# Altium PCB PCB1.PcbDoc (part 2 of 2)
Units mil, origin at the board's own origin, x right, y up, seen from the top; angles counter-clockwise.
Board outline 3661.42 x 3543.31 mil, 2 copper layers (Top Layer, Bottom Layer); 305 components, 305 nets, 1414 pads, 47 vias.
Unrouted connection lines stored in the file: 699.
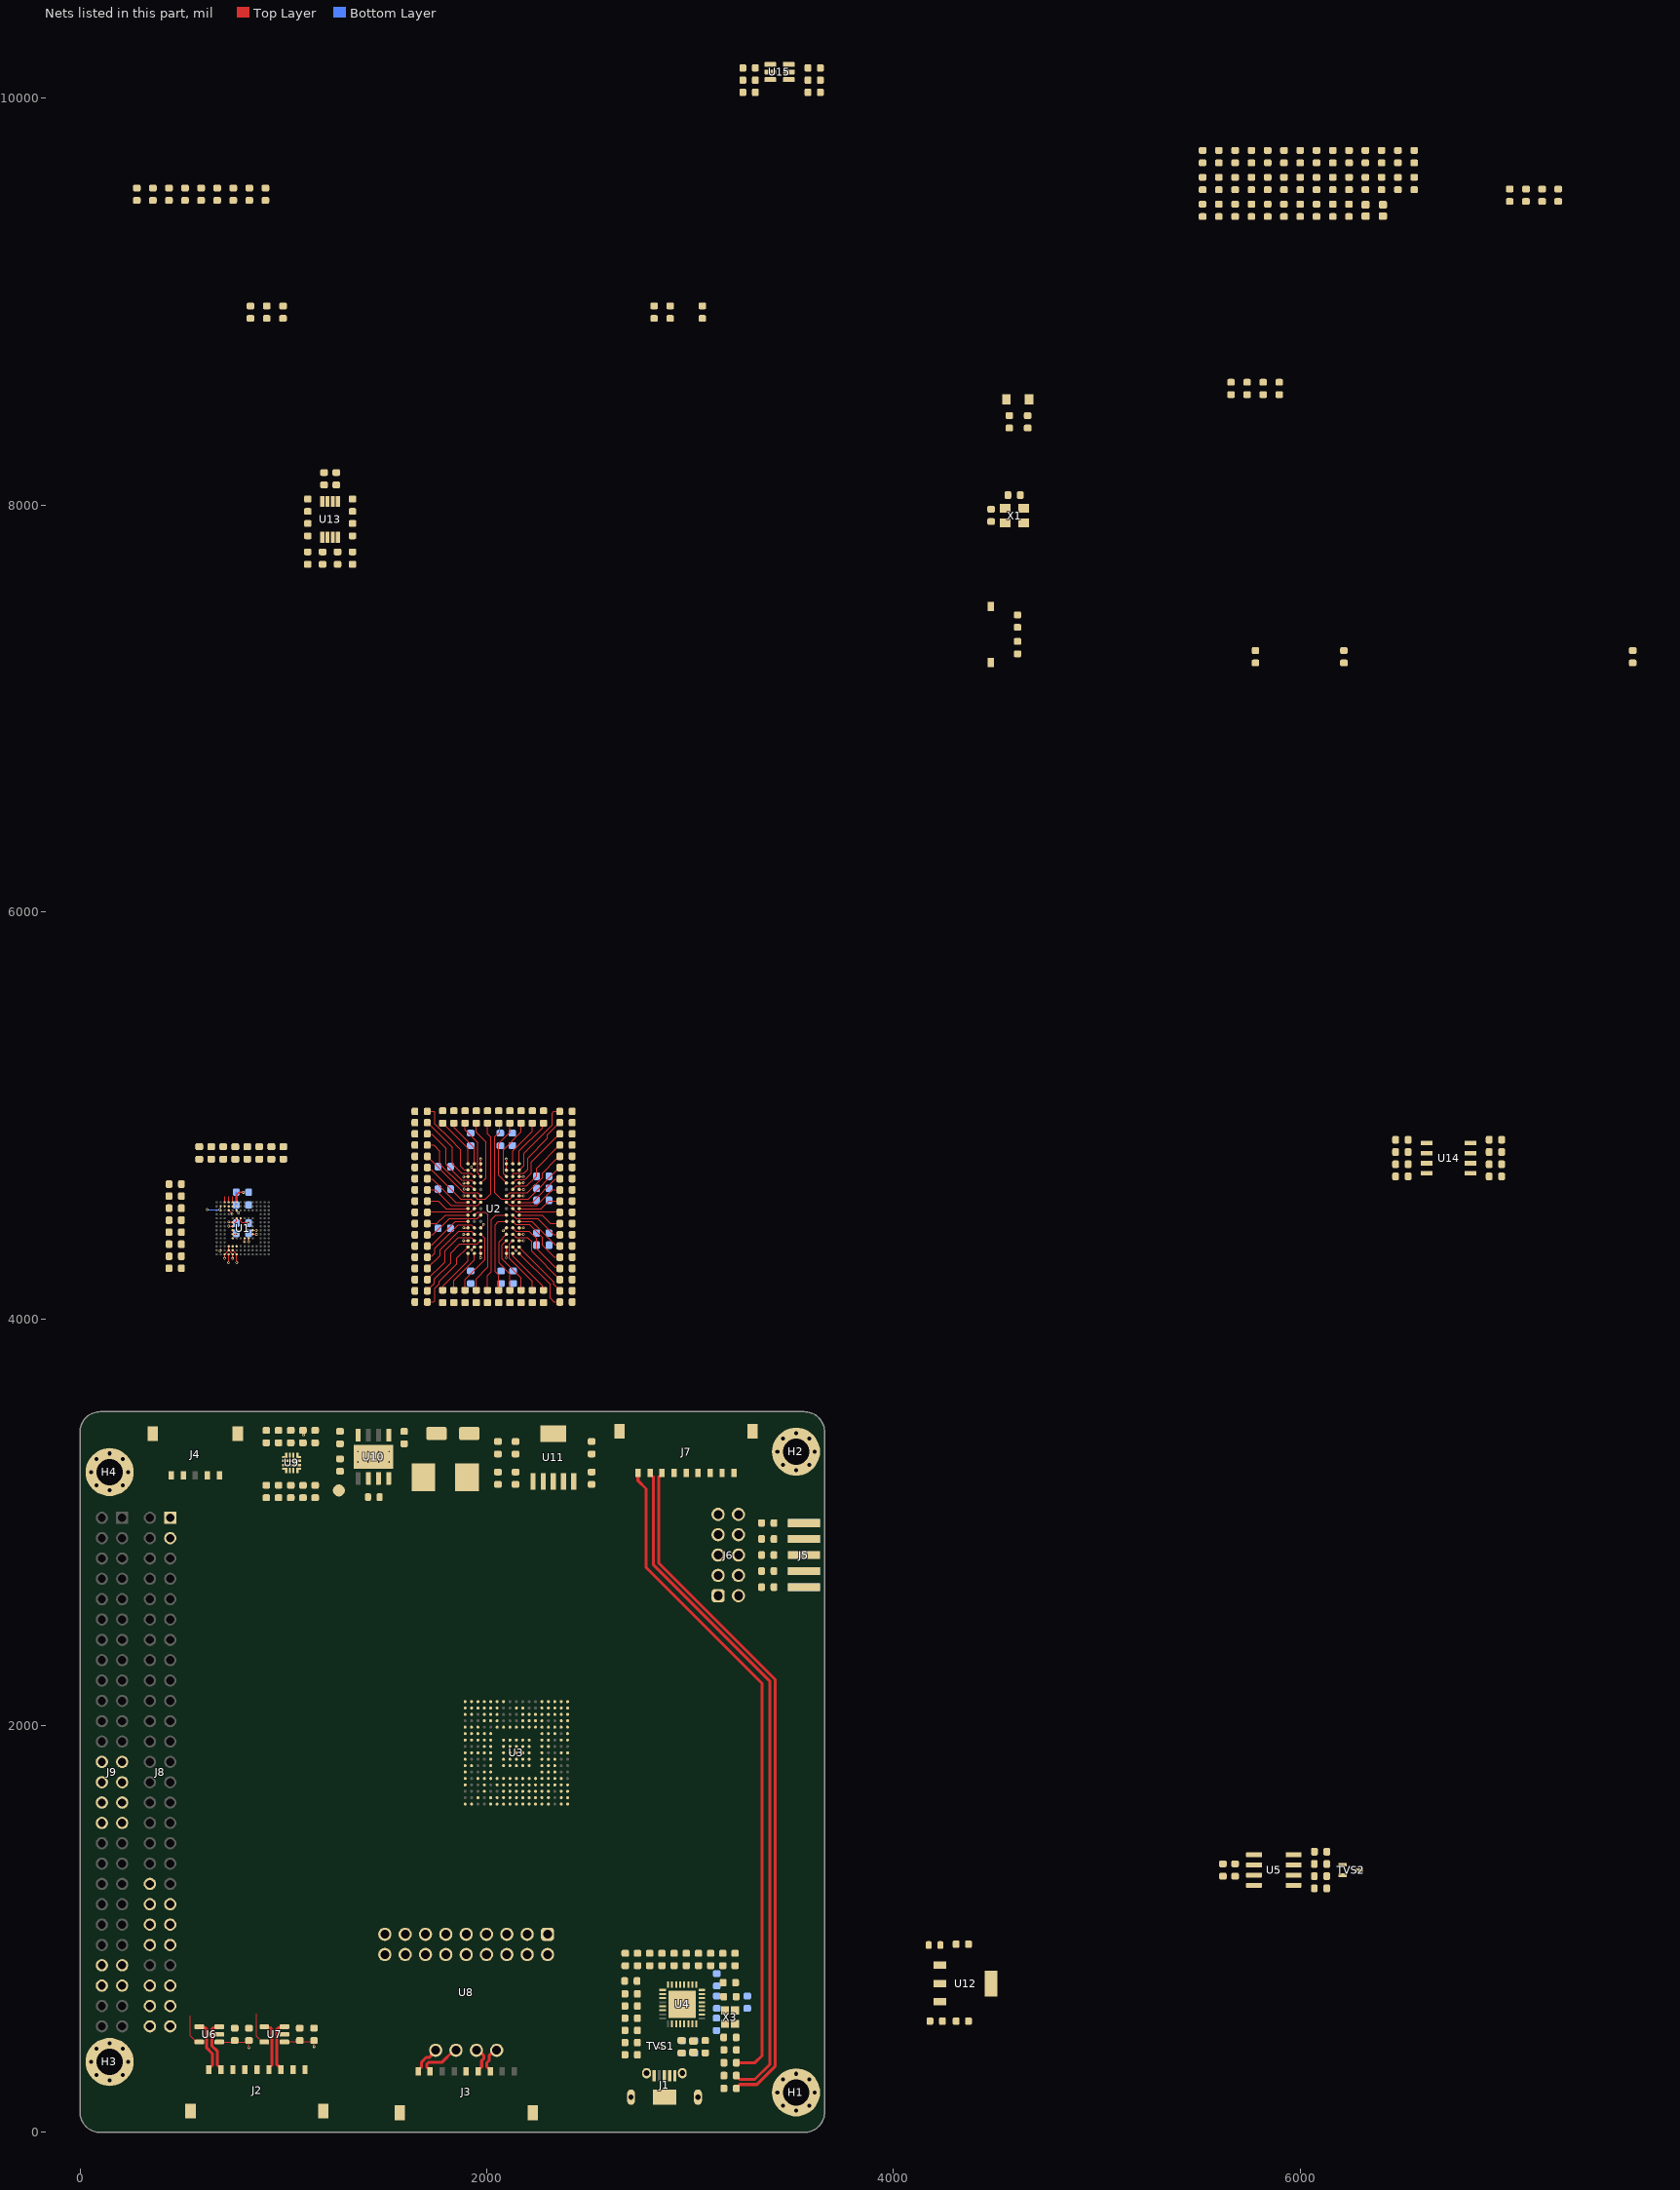
[diagram p2: the nets of this part, all layers, seen from the top]

## Part data
BT1: library part BT2, "Switch button 2 pin"
C1 C2 C3 C4 C5 C6 C7 C8 C9 C10 C11 C12 C13 C14 C15 C16 C17 C18 C19 C20 C21 C22 C23 C24 C25 C26 C27 C28 C29 C30 C31 C32 C33 C34 C35 C36 C37 C38 C39 C40 C41 C44 C45 C46 C47 C48 C49 C50 C51 C52 C53 C54 C55 C56 C57 C58 C59 C60 C61 C62 C63 C64 C65 C66 C67 C68 C69 C70 C71 C72 C73 C74 C75 C76 C77 C78 C79 C80 C81 C82 C83 C84 C85 C86 C87 C88 C89 C90 C91 C92 C93 C94 C95 C96: library part CAP_SMD, "CAP_Chip"
C42 C43: library part _CAP_C_2, "CAP CHIP"
D1: "DIODE SCHOTTKY 40V 5A SMA", MPN=SS34, Solder=SMT
FB1 FB2 FB3: "FERRITE BEAD"
J1: "RightAngle SMT TypeABVersion 2.0 Micro USB Conn Skt,30Vac,1.8A 47650 MICRO-USB", Package=None, Check_prices=https://www.snapeda.com/parts/47590-0001/Molex/view-part/?ref=eda, MF=Molex, MP=47590-0001, SnapEDA_Link=https://www.snapeda.com/parts/47590-0001/Molex/view-part/?ref=snap
J2 J3 J7: "Connector Header Surface Mount, Right Angle 9 position 0.059\" (1.50mm)"
J4: "1.50mm Pitch, Pico-Lock PCB Header, Single Row, Right-Angle, Surface Mount, Gold (Au) Plating, Positive Lock, 5 Circuits, Tape and Reel", Manufacturer_Name="Molex Connector Corporation", Copyright="Copyright (C) 2025 Ultra Librarian. All rights reserved.", Manufacturer_Part_Number=5040500591, RefDes=RefDes, Type=Type
J5: "pads for STLink V3 minie"
J6: "WR-PHD Pin Header, THT, Vertical, pitch 2.54mm, 2 Row, 10P", Contact Resistance=20mOhm, Manufacturer="Wurth Elektronik", Operating Temperature Max=105°C, Operating Temperature Min=-40°C, Rated Current=3A, Withstanding Voltage=500V, Working Voltage=250V, Category="Board-to-Board Connectors", ComponentLink1Description="Website Link", ComponentLink1URL=https://www.we-online.com/redexpert/article/61301021121?ad, ComponentLink2Description="Datasheet Link", ComponentLink2URL=https://www.we-online.com/redexpert/spec/61301021121?ad, Gender="Pin Header", Manufacturer Part Number=61301021121, Match Code=WR-PHD, Mount="Through Hole", Number of Pins=10, Number Of Rows=2, Orientation=Vertical, Packaging=Bag, Pitch=2.54mm
J8 J9: "PC / 104 Connectors Elevated Socket Strip"
L1: library part _IND, "FIXED IND 22UH 2.5A 170 MOHM SMD"
L2: library part IND
LED1 LED2 LED3 LED4 LED5: library part "LED SMD"
R1 R2 R3 R4 R5 R6 R7 R8 R9 R10 R11 R12 R13 R14 R15 R16 R17 R18 R19 R20 R21 R22 R23 R24 R25 R26 R27 R28 R29 R30 R31 R32 R33 R34 R35 R36 R37 R38 R39 R40 R41 R42 R43 R44 R45 R46 R47 R48 R49 R50 R51 R52 R53 R54 R55 R56 R57 R58 R59 R60 R61 R62 R63 R64 R65 R66 R67 R68 R69 R70 R71 R72 R73 R74 R75 R76 R77 R78 R79 R80 R81 R82 R83 R84 R85 R86 R87 R88 R89 R90 R91 R92 R93 R94 R95 R96 R97 R98 R99 R100 R101 R102 R103 R104 R105 R106 R107 R108 R109 R110 R111 R112 R113 R114 R115 R116 R117 R118 R119 R120 R121 R122 R123 R124 R125 R126 R127 R128 R129 R130 R131 R132 R133 R134 R135 R136 R137 R138 R139 R140 R141 R142 R143 R144 R145 R146 R147 R148 R149 R150 R151 R152 R153 R154 R155 R156 R157 R158 R159 R160 R161: library part _RES_B_2, "RES"
TP1: library part MCD-00630, "Test Point 0.3mm", Manufacturer=N/A, Manufacturer_HQ_COO=Unknown, Component_Country_Of_Origin=Unknown, ComponentLink1URL=http://tunmcdsvn.tun.st.com/Component_Documentation_Library/Trunk, ECCN_EU=n/a, ECCN_US=n/a, ID=3115, Initial_Board_Reference=MB1264, Internal_Part_Number=MCD-00630, Manufacturer_Part_Number=N/A, Order_Code_Digikey=N/A, Order_Code_Farnell=N/A, Order_Code_RS=N/A, Part_Preference=Recommended, Part_Type=Misc, Provided_By=n/a, ShowFields=YES, Status=Released
TVS1: "TVS DIODE 3VWM 4FLIPCHIP", Manufacturer_Name=STMicroelectronics, Copyright="Copyright (C) 2025 Ultra Librarian. All rights reserved.", Manufacturer_Part_Number=USBULC6-2F3, RefDes=RefDes, Type=Type
TVS2: "Automotive dual-line TVS in SOT323-3L for CAN bus (12 V system)", Manufacturer_Name=STMicroelectronics, Copyright="Copyright (C) 2025 Ultra Librarian. All rights reserved.", Manufacturer_Part_Number=ESDCAN02-2BWY, RefDes=RefDes, Type=Type
U1: "NAND Flash Serial e-MMC 3.3V 32G-bit 32G/8G/4G x 1/4-bit/8-bit 13.7ns 153-Pin WFBGA", Manufacturer_Name="KIOXIA Corporation", Mouser Part Number=757-THGBMTG5D1LBAIL, Arrow Part Number=THGBMTG5D1LBAIL, Arrow Price/Stock=null?region=nac, Datasheet Link=https://static6.arrow.com/aropdfconversion/5b79d7e5222d5200711a0ed1082b7aa51b6d9eb4/xia_thgbmtg5d1lbail15nm4gbe-mmcver5.0_e_rev.1.0_20211007.pdf, Geometry.Height=0.8mm, Manufacturer_Part_Number=THGBMTG5D1LBAIL, Mouser Price/Stock=https://www.mouser.co.uk/ProductDetail/Kioxia-America/THGBMTG5D1LBAIL?qs=Znm5pLBrcAKPRFVhV%252B0AbQ%3D%3D
U2: "DRAM 128M, 3.3V, SDRAM, 4Mx32, 166Mhz, 90 ball BGA (8mmx13mm) RoHS", Manufacturer_Name="Integrated Silicon Solution Inc.", Arrow Part Number=IS42S32400J-6BL, Arrow Price/Stock=https://www.arrow.com/en/products/is42s32400j-6bl/integrated-silicon-solution-inc?utm_currency=USD&region=nac, Datasheet Link=https://www.issi.com/WW/pdf/42-45S32400J.pdf, Geometry.Height=1.2mm, Manufacturer_Part_Number=IS42S32400J-6BL
U3: "High-performance and DSP with DP-FPU, Arm Cortex-M7 + Cortex-M4 MCU with 2MBytes of Flash memory, 1MB RAM, 480 MHz CPU, Art Accelerator, L1 cache, external memory interface, large set of peripherals, SMPS", Manufacturer_Name=STMicroelectronics, Copyright="Copyright (C) 2025 Ultra Librarian. All rights reserved.", Datasheet=https://www.st.com/resource/en/datasheet/stm32h745zg.pdf, Manufacturer_Part_Number=STM32H745XIH6, RefDes=RefDes, Type=Type
U4: "IC TRANSCEIVER HALF 1/1 32QFN"
U5: "3.3 V CAN Transceiver with Standby Mode", Package="SOIC-8 Texas Instruments", Check_prices=https://www.snapeda.com/parts/SN65HVD230DR/Texas+Instruments/view-part/?ref=eda, MF="Texas Instruments", MP=SN65HVD230DR, SnapEDA_Link=https://www.snapeda.com/parts/SN65HVD230DR/Texas+Instruments/view-part/?ref=snap
U6 U7: "Automotive LVDS Differential Driver"
U10: "5.5V to 36V Input, 3A, 500kHz Step-Down Converter", Package="HSOIC-8 Texas Instruments", Availability="In Stock", Check_prices=https://www.snapeda.com/parts/TPS5430DDAR/Texas+Instruments/view-part/?ref=eda, MF="Texas Instruments", MP=TPS5430DDAR, Price=None, Purchase-URL=https://pricing.snapeda.com/search/part/TPS5430DDAR/?ref=eda, SnapEDA_Link=https://www.snapeda.com/parts/TPS5430DDAR/Texas+Instruments/view-part/?ref=snap
U11: "1.5-A, 20-V, ultra-low-dropout voltage regulator with reverse current protection & enable 6-SOT-223 -40 to 125", Manufacturer_Name="Texas Instruments", Copyright="Copyright (C) 2025 Ultra Librarian. All rights reserved.", Datasheet=https://www.ti.com/lit/gpn/tps7a45, Manufacturer_Part_Number=TPS7A4533DCQR, RefDes=RefDes, Type=TYPE
U12: "Adjustable and fixed low drop positive voltage regulator", Manufacturer_Name=STMicroelectronics, Copyright="Copyright (C) 2025 Ultra Librarian. All rights reserved.", Datasheet=https://www.st.com/resource/en/datasheet/ld1117.pdf, Manufacturer_Part_Number=LD1117S18TR, RefDes=RefDes, Type=Type
U13: "No Description Available", Manufacturer_Name=NXP, Copyright="Copyright (C) 2025 Ultra Librarian. All rights reserved.", Manufacturer_Part_Number=PCA9508DP,118, RefDes=RefDes, Type=Type
U14: "No Description Available", Manufacturer_Name=ISSI, Copyright="Copyright (C) 2025 Ultra Librarian. All rights reserved.", Manufacturer_Part_Number=IS66WVS4M8BLL-104NLI, RefDes=RefDes, Type=Memory
U15: "OSC PROG TIMER TSOT23-6"
X1: "Crystal, 16 MHz, -30 to 85 degC, 3.2 x 2.5 x 0.9 mm SMD"
X2: "32.768 kHz ±20ppm Crystal 12.5pF 70 kOhms 2-SMD, No Lead", Manufacturer_Name=NDK, Copyright="Copyright (C) 2025 Ultra Librarian. All rights reserved.", Manufacturer_Part_Number=MU00525-32.768K, Type=Crystals
X3: library part NSC5004D-25M, "XTAL OSC XO 24.0000MHZ CMOS SMD", Manufacturer_Name=NDK, Manufacturer_Part_Number=NSC5004A-25M, Copyright="Copyright (C) 2025 Ultra Librarian. All rights reserved.", RefDes=RefDes, Type=Oscillators

## Via types
v1: diameter 13.78, hole 7.87, Top Layer to Bottom Layer, 47 vias

## Nets (pads, with @x,y where several pads share a name; then routed paths per layer and width w, separated by ;. In a path a pad name is that pad's centre, name@x,y a point inside that pad or via, vN(x,y) a via of type N, cw(c..) or ccw(c..) an arc to the next point about the centre after c; other vN are vias at no path point)
1V8: C29.2 C50.2 C51.2 U4.28 U4.30 U12.2
3.3V: C33.1 C34.1 U5.3
3V3: C1.2 C2.2 C3.2 C4.2 C7.2 C8.2 C9.2 C10.2 C11.2 C12.2 C13.2 C14.2 C15.2 C16.2 C17.2 C18.2 C19.2 C20.2 C27.2 C28.2 C32.2 C36.2 C37.2 C38.2 C39.2 C48.2 C49.2 C54.2 C55.2 C56.2 C57.2 C58.2 C59.2 C60.2 C61.2 C62.2 C63.2 C64.2 C65.2 C66.2 C67.2 C68.2 C69.2 C70.1 C71.2 C72.2 C73.2 C74.2 C75.2 C76.2 C77.2 C78.2 C79.2 C80.2 C82.1 C84.2 C85.2 C88.1 C89.1 C90.2 C91.2 C92.1 C95.2 C96.2 FB2.1 FB3.1 J5.6 J6.1 L2.1 R1.2 R2.2 R3.2 R4.2 R5.2 R6.2 R7.2 R8.2 R17.2 R18.2 R79.1 R81.1 R82.1 R84.1 R87.1 R106.2 R107.1 R108.1 R109.1 R110.1 R117.2 R118.2 R126.2 R133.1 R134.1 R135.1 R136.1 R150.2 R151.2 R152.2 U1.C6 U1.E6 U1.F5 U1.J10 U1.K9 U1.M4 U1.N4 U1.P3 U1.P5 U2.A7 U2.B2 U2.B7 U2.C9 U2.D9 U2.E1 U2.F9 U2.L1 U2.L7 U2.M9 U2.N9 U2.P2 U2.P7 U2.R7 U3.A6 U3.B1 U3.C17 U3.E6 U3.E9 U3.E11 U3.F5 U3.F17 U3.G2 U3.G5 U3.G13 U3.G17 U3.H5 U3.H13 U3.J13 U3.K5 U3.K13 U3.L5 U3.L13 U3.M5 U3.M13 U3.N7 U3.N8 U3.N10 U3.N11 U3.N12 U3.P17 U3.U12 U4.21 U4.32 U6.1 U7.1 U11.4 U11.5 U12.3 U13.1 U13.8 U14.8 U15.1 X3.4 | length 1012.6
  Top Layer w5.91: U6.1@685.24,444.72 753.94,444.72 C39.2@760.83,451.61 768.1,444.34 823.55,444.34 C38.2@830.83,451.61 v1(830.83,417.13) ; v1(711.31,4297) 711.37,4297.06 711.37,4317.13 U1.P3@711.42,4317.19 U1.N4@731.11,4336.87 ; U1.M4@731.11,4356.56 U1.N4@731.11,4336.87 ; v1(731.47,4476.12) 732.2,4475.39 750.07,4475.39 U1.F5@750.79,4474.67 763.39,4474.67 770.48,4481.76 U1.E6@770.48,4494.35 ; v1@750.79,4297.11 U1.P5@750.79,4317.19 U1.N4@731.11,4336.87 ; U1.C6@770.48,4533.72 770.48,4531.99 779.65,4522.81 v1(779.65,4520.88) ; U1.K9@829.53,4395.93 829.72,4395.74 829.72,4379.23 v1(829.91,4379.04) ; U1.J10@848.82,4415.22 U1.J10@849.22,4415.61 849.53,4415.3 867.64,4415.3 v1(867.96,4414.98) ; U7.1@1005.24,444.72 1006.18,445.67 1149.88,445.67 C36.2@1150.83,446.61 ; v1(1150.83,422.13) C36.2@1150.83,446.61 ; C36.2@1150.83,451.61 C36.2@1150.83,446.61 ; v1(1886.95,4447.58) 1887.36,4447.17 U2.L1@1907.72,4447.17 U2.L1@1908.14,4446.75 ; v1(1888.48,4637.99) 1889.4,4637.06 1906.8,4637.06 U2.E1@1907.72,4636.14 ; v1(1924.47,4745.48) 1924.47,4745.43 1939.18,4730.72 U2.B2@1939.23,4730.72 ; v1(1925.08,4338.07) 1925.08,4338.3 1939.22,4352.44 U2.P2@1939.22,4352.68 ; v1(2081.1,4433.25) 2081.94,4433.25 2095.85,4447.17 U2.L7@2096.7,4447.17 ; U2.B7@2096.7,4730.63 v1(2096.7,4785.9) ; U2.N9@2159.27,4384.59 U2.N9@2159.69,4384.17 2180.05,4384.17 v1(2180.47,4383.76) ; U2.M9@2159.27,4416.09 U2.M9@2159.69,4415.67 2180.05,4415.67 v1(2180.47,4415.25) ; U2.F9@2159.27,4605.06 U2.F9@2159.69,4604.65 2180.05,4604.65 v1(2180.47,4604.23) ; U2.D9@2159.69,4667.64 2160.19,4668.14 2179.79,4668.14 v1(2180.3,4668.64) ; U2.C9@2159.72,4699.16 v1(2179.8,4699.19)
  Top Layer w8: v1(2096.28,4300.4) 2096.49,4300.61 2096.49,4352.47 U2.P7@2096.7,4352.68
  Bottom Layer w8: C4.2@768.43,4559.75 C3.2@768.43,4622.74 ; C4.2@768.78,4559.4 768.78,4531.65 v1@779.56,4520.88
  other v1: 750.74,4297.06
3V3_BUS: J9.27 J9.28
3V3_SW1: J8.48
3V3_SW2: J8.50
3V3_SW3: J8.52
5V: C46.2 C47.2 C52.2 C53.2 L1.2 R123.1 R125.2 U11.1 U11.2
5V_BUS: J9.25 J9.26
5V_SW1: J8.47
5V_SW2: J8.49
5V_SW3: J8.51
12V: C40.2 C45.2 R124.2 SB1.2 TP1.1 U9.6 U10.7
12V_CONN: C41.2 J4.1 J4.2 J7.1 R119.1 SB1.1 U9.5
ADC_ILM: C21.2 R85.2
AUXOFF: R117.1 U9.3
BOOT0: R81.2 R83.1 U3.E8
CAN0_H: J8.03 R142.2
CAN0_L: J8.01 R141.2
CAN_RX: U3.E16 U5.4
CAN_TX: U3.E17 U5.1
COMM_I2C4_EN: R139.2
COMM_I2C4_SCL: R137.2 U3.B5 U3.R16
COMM_I2C4_SDA: R138.2 U3.C5 U3.R17
DEBUG_UART_RX: J5.10 R132.1 U3.N4
DEBUG_UART_TX: J5.9 R131.1 U3.N5
eMMC_RSTn: R17.1 R19.1 U1.K5
FLT#: R118.1 U9.4
FPGA_D0: U3.N6 U8.1
FPGA_D1: U3.P6 U8.2
FPGA_D2: U3.T6 U8.3
FPGA_D3: U3.U6 U8.4
FPGA_D4: U3.U7 U8.5
FPGA_D5: U3.R12 U8.6
FPGA_D6: U3.N15 U8.7
FPGA_D7: U3.N14 U8.8
FPGA_D8: U3.N13 U8.9
FPGA_D9: U3.M14 U8.10
FPGA_RefC: U3.E15 U8.18
FPGA_STATUS0: U3.L14 U8.11
FPGA_STATUS1: U3.K14 U8.12
FPGA_STATUS2: U3.D11 U8.13
FPGA_STATUS3: U3.E10 U8.14
FPGA_STATUS4: U3.D10 U8.15
FPGA_TxC: U3.N3 U8.17
FPGA_TxC_N: J3.7 U8.19 | length 138
  Top Layer w15: J3.7@2017.09,300.87 2017.09,308.37 2011.59,313.87 2008.85,313.87 2000.06,322.65 2000.06,342.23 2011.48,353.64 2011.48,376.42 2039.3,404.25 U8.19@2048.98,404.25
FPGA_TxC_P: J3.6 U8.20 | length 138
  Top Layer w15: U8.20@1948.98,404.25 1958.65,404.25 1986.48,376.42 1986.48,364 1975.06,352.58 1975.06,322.65 1966.27,313.87 1963.53,313.87 1958.03,308.37 J3.6@1958.03,300.87
FPGA_TxD_N: J3.2 U8.21 | length 215.7
  Top Layer w15: J3.2@1721.81,300.87 1721.81,308.37 1716.31,313.87 1713.57,313.87 1704.78,322.65 1704.78,335.08 1713.57,343.87 1778.92,343.87 1839.3,404.25 U8.21@1848.98,404.25
FPGA_TxD_P: J3.1 U8.22 | length 150
  Top Layer w15: J3.1@1662.76,300.87 1662.76,308.37 1668.26,313.87 1671,313.87 1679.78,322.65 1679.78,345.43 1703.21,368.87 1719.03,368.87 1748.98,398.81 U8.22@1748.98,404.25
FRAM_CS: R153.1
FRAM_SPI6_MISO: R156.1
FRAM_SPI6_MOSI: R155.1
FRAM_SPI6_SCK: R154.1
GND: BT1.1 C1.1 C2.1 C3.1 C4.1 C5.1 C6.1 C7.1 C8.1 C9.1 C10.1 C11.1 C12.1 C13.1 C14.1 C15.1 C16.1 C17.1 C18.1 C19.1 C20.1 C21.1 C22.1 C23.1 C24.1 C25.1 C26.1 C27.1 C28.1 C29.1 C30.1 C31.1 C32.1 C33.2 C34.2 C35.2 C36.1 C37.1 C38.1 C39.1 C40.1 C41.1 C42.1 C43.1 C45.1 C46.1 C47.1 C48.1 C49.1 C50.1 C51.1 C52.1 C53.1 C54.1 C55.1 C56.1 C57.1 C58.1 C59.1 C60.1 C61.1 C62.1 C63.1 C64.1 C65.1 C66.1 C67.1 C68.1 C69.1 C70.2 C71.1 C72.1 C73.1 C74.1 C75.1 C76.1 C77.1 C78.1 C79.1 C80.1 C81.1 C82.2 C83.2 C84.1 C85.1 C86.1 C87.1 C88.2 C89.2 C90.1 C91.1 C92.2 C93.1 C94.1 C95.1 C96.1 D1.1 H1.1 H2.1 H3.1 H4.1 J1.5 J1.SH1 J1.SH2 J1.SH3 J1.SH4 J1.SH5 J2.5 J2.10 J3.5 J3.10 J4.4 J4.5 J4.6 J5.7 J6.3 J6.10 J7.2 J7.10 J9.29 J9.30 J9.31 J9.32 J9.47 J9.48 LED3.2 LED4.2 LED5.2 R22.1 R83.2 R86.2 R95.2 R111.2 R112.2 R113.2 R116.1 R121.2 R122.2 R127.2 R140.2 R160.1 R161.1 TVS1.B1 TVS1.B2 TVS2.3 U1.A6 U1.C4 U1.E7 U1.G5 U1.H10 U1.J5 U1.K8 U1.N2 U1.N5 U1.P4 U1.P6 U2.A3 U2.B3 U2.B8 U2.C1 U2.D1 U2.E9 U2.F1 U2.L3 U2.L9 U2.M1 U2.N1 U2.P3 U2.P8 U2.R3 U3.A1 U3.A17 U3.B2 U3.B6 U3.C10 U3.C13 U3.C16 U3.F2 U3.G7 U3.G8 U3.G9 U3.G10 U3.G11 U3.G16 U3.H7 U3.H8 U3.H9 U3.H10 U3.H11 U3.J3 U3.J7 U3.J8 U3.J9 U3.J10 U3.J11 U3.J16 U3.J17 U3.K7 U3.K8 U3.K9 U3.K10 U3.K11 U3.K15 U3.L7 U3.L8 U3.L9 U3.L10 U3.L11 U3.L15 U3.M15 U3.N1 U3.N16 U3.P1 U3.R4 U3.R8 U3.T12 U3.U1 U3.U17 U4.33 U5.2 U6.2 U7.2 U9.8 U10.6 U10.9 U11.3 U11.6 U12.1 U12.4 U13.4 U14.4 U15.2 X1.2 X1.4 X3.2 | length 642.6
  Top Layer w5.91: v1(688.29,4333.42) U1.N2@691.74,4336.87 ; v1(731.12,4276.37) U1.P4@731.11,4317.19 ; U1.C4@731.11,4533.72 731.11,4532.78 747.96,4515.93 v1(747.96,4514.98) ; v1(731.57,4455.55) 750.23,4455.55 U1.G5@750.79,4454.98 ; U1.N5@750.79,4336.87 U1.P6@770.48,4317.19 v1(770.48,4276.38) ; U1.J5@750.79,4415.61 v1(770.4,4415.61) ; U1.E7@790.16,4494.35 790.16,4480.71 797.19,4473.68 828.34,4473.68 v1(828.85,4474.19) ; v1(809.72,4379.82) 809.79,4379.88 U1.K8@809.85,4395.93 U1.K8@809.85,4395.93 ; U1.H10@849.22,4435.3 849.73,4434.79 865.96,4434.79 v1(866.47,4434.27) ; v1(1886.4,4384.47) 1886.55,4384.32 1907.57,4384.32 U2.N1@1907.72,4384.17 ; v1(1886.4,4415.97) 1886.55,4415.82 1907.57,4415.82 U2.M1@1907.72,4415.67 ; v1@1887.36,4604.65 U2.F1@1907.72,4604.65 ; v1@1887.36,4667.64 U2.D1@1907.72,4667.64 ; v1@1887.36,4699.13 U2.C1@1907.72,4699.13 ; v1(1970.24,4786.14) 1970.48,4785.9 1970.48,4762.37 U2.A3@1970.71,4762.13 U2.B3@1970.71,4730.63 U2.B3@1970.95,4730.63 ; v1(1970.28,4300.4) 1970.5,4300.62 1970.5,4320.97 U2.R3@1970.71,4321.18 U2.P3@1970.71,4352.68 ; U2.L3@1970.71,4447.17 1970.71,4449.1 1984.25,4462.63 v1(1984.25,4464.56) ; U2.P8@2128.2,4352.68 2128.2,4352.42 2143.38,4337.23 v1(2143.38,4336.97) ; U2.L9@2159.69,4447.17 2159.84,4447.32 2180.86,4447.32 v1(2181.01,4447.47) ; U2.E9@2159.69,4636.14 2160.11,4635.72 2180.47,4635.72 v1(2180.88,4635.31)
  Top Layer w8: U1.A6@770.48,4573.09 770.53,4608.92 783.67,4622.05 v1(803.15,4622.05)
  other v1: 1886.95,4604.23 1886.95,4667.22 1886.95,4698.72
I2C0_SCL: J8.40 R145.1
I2C0_SDA: J8.38 R143.1
I2C1_SCL: J8.43 R148.2
I2C1_SDA: J8.41 R146.2
I2C2_SCL: J8.44 R149.1
I2C2_SDA: J8.42 R147.1
JTCK/SWCLK: J5.2 R129.2 U3.B14
JTDI: J5.4 J6.8 U3.A14
JTDO/SWO: J5.1 R128.2 U3.C6
JTMS/SWDIO: J5.3 R130.2 U3.C15
K_IN: U3.B10 U8.16
LED1: LED1.2
LED2: LED2.2
LVDS_RxC_N: J2.9
LVDS_RxC_P: J2.8
LVDS_RxD_N: J2.4
LVDS_RxD_P: J2.3
LVDS_SPI_MOSI: U3.C11 U6.5 | length 154.1
  Top Layer w5.91: 543.09,573.74 543.09,475.85 574.21,444.72 U6.5@586.42,444.72
LVDS_SPI_SCK: U3.B9 U7.5 | length 162.8
  Top Layer w5.91: 867.16,584.07 867.16,471.78 894.21,444.72 U7.5@906.42,444.72
LVDS_TxC_N: J2.7 U7.3 | length 250
  Top Layer w15: J2.7@988.19,308.74 988.19,316.24 982.69,321.74 979.95,321.74 968.33,333.36 968.33,506.63 977.11,515.41 1001.12,515.41 U7.3@1005.24,519.53
LVDS_TxC_P: J2.6 U7.4 | length 246
  Top Layer w15: U7.4@906.42,519.53 910.53,515.41 934.54,515.41 943.33,506.63 943.33,330.43 929.13,316.24 J2.6@929.13,308.74
LVDS_TxD_N: J2.2 U6.3 | length 260.2
  Top Layer w15: U6.3@685.24,519.53 681.12,515.41 657.11,515.41 648.33,506.63 648.33,425.77 675.89,398.21 675.89,330.53 684.67,321.74 687.41,321.74 692.91,316.24 J2.2@692.91,308.74
LVDS_TxD_P: J2.1 U6.4 | length 260.2
  Top Layer w15: U6.4@586.42,519.53 590.53,515.41 614.54,515.41 623.33,506.63 623.33,415.41 650.89,387.85 650.89,330.53 642.1,321.74 639.36,321.74 633.86,316.24 J2.1@633.86,308.74
NetC5_2: C5.2 C6.2 U1.C2 | length 68.8
  Top Layer w5.91: v1(688.29,4537.17) U1.C2@691.74,4533.72
  Bottom Layer w5.91: v1(624.39,4537.05) 624.45,4537.11 688.23,4537.11 v1(688.29,4537.17)
NetC30_2: C30.2 C31.2 U4.20 U4.23
NetC35_1: C35.1 R114.1 R115.2 U5.5
NetC42_2: C42.2 U9.10
NetC43_2: C43.2 U9.7
NetC44_1: C44.1 D1.2 L1.1 U10.8
NetC44_2: C44.2 U10.1
NetC81_2: C81.2 L2.2 U3.E1
NetC83_1: C83.1 FB2.2 U3.F1
NetC86_2: C86.2 C87.2 U3.A7 U3.D17 U3.U11
NetC93_2: C93.2 C94.2 FB3.2 U3.L1 U3.M1
NetFB1_1: FB1.1 R96.2
NetFB1_2: FB1.2 J1.1 R88.1
NetJ6_2: J6.2 R128.1
NetJ6_4: J6.4 R129.1
NetJ6_6: J6.6 R130.1
NetJ6_7: J6.7 R131.2
NetJ6_9: J6.9 R132.2
NetJ7_3: J7.3 R114.2 R142.1 TVS2.1 U5.7
NetJ7_4: J7.4 R115.1 R141.1 TVS2.2 U5.6
NetJ7_5: J7.5 R136.2 R145.2 R148.1 R149.2 U13.7
NetJ7_6: J7.6 R135.2 R143.2 R146.1 R147.2 U13.6
NetJ7_9: J7.9 R88.2 | length 3258.9
  Top Layer w15: J7.9@2744.09,3242.44 2744.09,3203.94 2783.46,3164.57 2783.46,2776.83 3354.33,2205.97 3354.33,377.95 3318.9,342.52 R88.2@3227.36,342.52
NetJ8_39: J8.39 R144.2
NetLED1_1: LED1.1 R79.2
NetLED2_1: LED2.1 R82.2
NetLED3_1: LED3.1 R124.1
NetLED4_1: LED4.1 R125.1
NetLED5_1: LED5.1 R126.1
NetR9_2: R9.2 U1.A3 | length 26.9
  Top Layer w5.91: U1.A3@711.42,4573.09 711.42,4599.98
NetR10_2: R10.2 U1.A4 | length 26.9
  Top Layer w5.91: U1.A4@731.11,4573.09 731.11,4599.98
NetR11_2: R11.2 U1.A5 | length 26.9
  Top Layer w5.91: U1.A5@750.79,4573.09 750.79,4599.98
NetR12_2: R12.2 U1.B2
NetR13_2: R13.2 U1.B3
NetR14_2: R14.2 U1.B4
NetR15_2: R15.2 U1.B5
NetR16_2: R16.2 U1.B6
NetR20_2: R20.2 U1.M5
NetR21_2: R21.2 U1.M6
NetR22_2: R22.2 U1.H5
NetR23_2: R23.2 U2.H9 | length 214.9
  Top Layer w5.91: U2.H9@2159.69,4541.65 2267.45,4541.65 2304.54,4578.74 R23.2@2359.25,4578.74
NetR24_1: R24.1 U2.E2 | length 358.3
  Top Layer w5.91: R24.1@1707.68,4854.33 1739.6,4854.33 1769.55,4824.37 1769.55,4762.26 1879.2,4652.61 1922.75,4652.61 U2.E2@1939.22,4636.14
NetR25_2: R25.2 U2.G7 | length 301.2
  Top Layer w5.91: U2.G7@2096.7,4573.15 2113.03,4556.82 2246.14,4556.82 2323.18,4633.86 R25.2@2359.25,4633.86
NetR26_1: R26.1 U2.D3 | length 324.1
  Top Layer w5.91: R26.1@1948.82,4961.61 1948.82,4917.32 1996.09,4870.06 1996.09,4693.01 U2.D3@1970.71,4667.64
NetR27_2: R27.2 U2.J3 | length 303.1
  Top Layer w5.91: R27.2@1707.68,4413.39 1735.45,4413.39 1815.75,4493.69 1954.24,4493.69 U2.J3@1970.71,4510.16
NetR28_1: R28.1 U2.D2 | length 377.9
  Top Layer w5.91: R28.1@1707.68,4909.45 1709.05,4908.07 1729.81,4908.07 1799.21,4838.67 1799.21,4759.84 1876.12,4682.93 1924.03,4682.93 U2.D2@1939.26,4667.69
NetR29_2: R29.2 U2.H1 | length 215.4
  Top Layer w5.91: R29.2@1707.68,4578.74 1762.18,4578.74 1799.27,4541.65 U2.H1@1907.72,4541.65
NetR30_1: R30.1 U2.B1 | length 401.1
  Top Layer w5.91: R30.1@1707.68,5019.69 1740.16,5019.69 1746.1,5013.74 1746.1,4958.61 1816.76,4887.95 1872.83,4831.9 1872.83,4748.2 1888.62,4732.41 1905.94,4732.41 U2.B1@1907.72,4730.63
NetR31_2: R31.2 U2.H2 | length 239
  Top Layer w5.91: R31.2@1707.68,4523.62 1709.76,4525.71 1748.03,4525.71 1842.52,4525.71 1923.27,4525.71 U2.H2@1939.22,4541.65
NetR32_1: R32.1 U2.C2 | length 389.3
  Top Layer w5.91: R32.1@1707.61,4965.6 1723.77,4949.43 ; 1723.79,4949.43 1831.51,4841.72 1831.51,4761.06 1876.96,4715.61 1922.75,4715.61 1939.12,4699.23 U2.C2@1939.26,4699.23
NetR33_2: R33.2 U2.G3 | length 301.2
  Top Layer w5.91: R33.2@1707.68,4633.86 1748.03,4633.86 1824.4,4557.49 1955.05,4557.49 U2.G3@1970.71,4573.15
NetR34_1: R34.1 U2.A1 | length 251
  Top Layer w5.91: R34.1@1783.46,4961.61 1907.72,4837.36 U2.A1@1907.72,4762.13
NetR35_2: R35.2 U2.G2 | length 302.4
  Top Layer w5.91: R35.2@1707.68,4744.09 1718.04,4733.73 1728.56,4733.73 1872.66,4589.62 1922.75,4589.62 1939.15,4573.21 U2.G2@1939.26,4573.21
NetR36_1: R36.1 U2.C3 | length 294.3
  Top Layer w5.91: R36.1@1893.7,4961.61 1893.7,4929.13 1955.26,4867.58 1955.26,4714.73 U2.C3@1970.76,4699.23
NetR37_2: R37.2 U2.G1 | length 248
  Top Layer w5.91: R37.2@1707.68,4688.98 1709.24,4687.41 1733.85,4687.41 1848.11,4573.15 U2.G1@1907.72,4573.15 U2.G1@1907.72,4573.21
NetR38_1: R38.1 U2.A2 | length 241.2
  Top Layer w5.91: R38.1@1838.58,4961.61 1840.04,4960.15 1840.04,4939.48 1939.22,4840.31 U2.A2@1939.22,4762.13
NetR39_2: R39.2 U2.F3 | length 354.4
  Top Layer w5.91: R39.2@1700.03,4806.86 1887.22,4619.67 1955.69,4619.67 U2.F3@1970.71,4604.65
NetR40_1: R40.1 U2.A8 | length 239.2
  Top Layer w5.91: U2.A8@2128.24,4762.22 2128.24,4826.18 2224.41,4922.35 R40.1@2224.41,4961.61
NetR41_2: R41.2 U2.F7 | length 355.2
  Top Layer w5.91: U2.F7@2096.7,4604.65 2113.17,4621.12 2199.86,4621.12 2273.99,4695.25 2273.99,4715.9 2342.66,4784.56 2343.64,4784.56 2358.29,4799.21 R41.2@2359.25,4799.21
NetR42_1: R42.1 U2.C7 | length 305
  Top Layer w5.91: U2.C7@2096.7,4699.13 2081.68,4714.16 2081.68,4831.97 2169.29,4919.59 R42.1@2169.29,4961.61
NetR43_2: R43.2 U2.G9 | length 247.5
  Top Layer w5.91: U2.G9@2159.69,4573.15 2224.04,4573.15 2337.12,4686.23 2356.51,4686.23 R43.2@2359.25,4688.98
NetR44_1: R44.1 U2.A9 | length 235.5
  Top Layer w5.91: U2.A9@2159.73,4762.22 2159.78,4762.22 2159.78,4825.13 2274.13,4939.48 2274.13,4948.28 R44.1@2275.59,4949.74
NetR45_2: R45.2 U2.G8 | length 301.9
  Top Layer w5.91: U2.G8@2128.2,4573.15 2144.67,4589.62 2204.78,4589.62 R45.2@2359.25,4744.09
NetR46_1: R46.1 U2.C8 | length 390.8
  Top Layer w5.91: U2.C8@2128.2,4699.13 2128.2,4712.15 2131.65,4715.61 2182.36,4715.61 2202.58,4735.83 2202.58,4790.97 2299.21,4887.6 2299.21,4904.53 R46.1@2359.25,4964.57
NetR47_1: R47.1 U2.B9 | length 388.3
  Top Layer w5.91: U2.B9@2159.74,4730.72 2183.86,4754.84 2183.86,4814.86 2321.27,4952.28 2321.27,5010.25 2330.71,5019.69 R47.1@2359.25,5019.69
NetR48_2: R48.2 U2.H8 | length 238.5
  Top Layer w5.91: U2.H8@2128.2,4541.65 2144.41,4525.44 2357.43,4525.44 R48.2@2359.25,4523.62
NetR49_1: R49.1 U2.D8 | length 362.9
  Top Layer w5.91: U2.D8@2128.24,4667.69 2144.21,4683.67 2187.61,4683.67 2220.47,4716.54 2220.47,4770.67 R49.1@2359.25,4909.45
NetR50_2: R50.2 U2.J7 | length 437.8
  Top Layer w5.91: R50.2@2003.94,4140.75 2003.94,4212.6 2023.62,4232.28 2023.62,4488.19 2045.59,4510.16 U2.J7@2096.7,4510.16
NetR51_1: R51.1 U2.D7 | length 332.4
  Top Layer w5.91: U2.D7@2096.75,4667.69 2096.65,4667.69 2059.06,4705.28 2059.06,4862.2 2114.17,4917.32 R51.1@2114.17,4961.61
NetR52_1: R52.1 U2.E8 | length 343.9
  Top Layer w5.91: U2.E8@2128.2,4636.14 2144.67,4652.61 2195.92,4652.61 2245.85,4702.55 2245.85,4740.93 R52.1@2359.25,4854.33
NetR53_2: R53.2 U2.K8 | length 325.6
  Top Layer w5.91: U2.K8@2128.2,4478.66 2143.22,4463.64 2209.72,4463.64 2274.81,4398.55 2274.81,4361.24 2332.91,4303.15 R53.2@2359.25,4303.15
NetR54_2: R54.2 U2.K7 | length 390.9
  Top Layer w5.91: R54.2@2059.05,4140.75 2059.05,4215.06 2041.76,4232.35 2041.76,4463.02 2057.4,4478.66 U2.K7@2096.7,4478.66
NetR55_1: R55.1 U2.R2 | length 222.1
  Top Layer w5.91: R55.1@1838.58,4140.75 1838.58,4188.98 1939.22,4289.61 U2.R2@1939.22,4321.18
NetR56_2: R56.2 U2.J9 | length 216.3
  Top Layer w5.91: U2.J9@2160.03,4509.82 2271.97,4509.82 2313.28,4468.5 R56.2@2359.25,4468.5
NetR57_1: R57.1 U2.N3 | length 406
  Top Layer w5.91: R57.1@1707.68,4137.8 1743.6,4173.72 1743.6,4196.36 1822.83,4275.59 1822.83,4322.83 1867.7,4367.7 1954.24,4367.7 U2.N3@1970.71,4384.17
NetR58_2: R58.2 U2.J8 | length 272.2
  Top Layer w5.91: U2.J8@2128.2,4510.16 2144.67,4493.69 2249.79,4493.69 2328.65,4414.82 R58.2@2360.91,4414.82
NetR59_1: R59.1 U2.R1 | length 231.9
  Top Layer w5.91: R59.1@1783.46,4140.75 1784.93,4142.21 1784.93,4162.88 1907.72,4285.68 U2.R1@1907.72,4321.18
NetR60_2: R60.2 U2.J2 | length 475.4
  Top Layer w5.91: U2.J2@1939.22,4510.16 1954.24,4525.18 1994.54,4525.18 2007.19,4512.53 2007.19,4255.23 1948.82,4196.85 R60.2@1948.82,4140.75
NetR61_1: R61.1 U2.N2 | length 354.9
  Top Layer w5.91: R61.1@1707.68,4192.91 1795.28,4280.51 1795.28,4334.65 1859.83,4399.2 1924.19,4399.2 U2.N2@1939.22,4384.17
NetR62_2: R62.2 U2.J1 | length 237.1
  Top Layer w5.91: R62.2@1693.65,4454.48 R62.2@1707.68,4468.5 1755.57,4468.5 1797.22,4510.16 U2.J1@1907.72,4510.16
NetR63_1: R63.1 U2.P1 | length 371.1
  Top Layer w5.91: R63.1@1707.68,4082.68 1738.82,4082.68 1744.8,4088.66 1744.8,4150.49 1766.94,4172.63 1766.94,4183.44 1852.98,4269.48 1852.98,4297.94 U2.P1@1907.72,4352.68
NetR64_1: R64.1 U2.M2 | length 344.2
  Top Layer w5.91: R64.1@1702.58,4236.5 1702.58,4241.97 R64.1@1708.16,4247.55 ; R64.1@1707.68,4248.03 1771.65,4312.01 1771.65,4340.69 1862.39,4431.43 1923.46,4431.43 U2.M2@1939.22,4415.67
NetR65_2: R65.2 U2.F2 | length 450.8
  Top Layer w5.91: U2.F2@1939.22,4604.65 1954.24,4589.62 1995.13,4589.62 2019.68,4614.17 2019.68,4893.7 2003.94,4909.45 R65.2@2003.94,4961.61
NetR66_1: R66.1 U2.M3 | length 324.1
  Top Layer w5.91: R66.1@1893.7,4140.75 1893.7,4193.04 1991.59,4290.93 1991.59,4394.79 U2.M3@1970.71,4415.67
NetR67_2: R67.2 U2.F8 | length 459.9
  Top Layer w5.91: R67.2@2059.06,4961.61 2063.07,4957.6 2063.07,4917.4 2040.26,4894.59 2040.26,4619.33 2069.97,4589.62 2113.17,4589.62 U2.F8@2128.2,4604.65
NetR68_1: R68.1 U2.L2 | length 318.8
  Top Layer w5.91: R68.1@1707.68,4303.15 1712.79,4308.26 1729.81,4308.26 1743.76,4322.21 1743.76,4347.05 1859.62,4462.91 1923.47,4462.91 U2.L2@1939.22,4447.17
NetR69_2: R69.2 U2.K1 | length 249.9
  Top Layer w5.91: R69.2@1707.68,4358.27 1713.19,4363.79 1729.81,4363.79 1844.68,4478.66 U2.K1@1907.72,4478.66
NetR70_1: R70.1 U2.L8 | length 343.2
  Top Layer w5.91: U2.L8@2128.2,4447.17 2143.76,4431.6 2208.46,4431.6 2244.77,4395.29 2244.77,4344.67 2337.12,4252.31 2354.97,4252.31 R70.1@2359.25,4248.03
NetR71_2: R71.2 U2.K9 | length 249.4
  Top Layer w5.91: U2.K9@2159.69,4478.66 2221.35,4478.66 2337.12,4362.89 2354.63,4362.89 R71.2@2359.25,4358.27
NetR72_1: R72.1 U2.M7 | length 312.4
  Top Layer w5.91: U2.M7@2096.7,4415.67 2060.24,4379.21 2060.24,4274.41 2114.17,4220.47 R72.1@2114.17,4140.75
NetR73_1: R73.1 U2.M8 | length 351.6
  Top Layer w5.91: U2.M8@2128.2,4415.67 2144.09,4399.78 2200.59,4399.78 2220.57,4379.79 2220.57,4331.59 R73.1@2359.25,4192.91
NetR74_1: R74.1 U2.P9 | length 297.5
  Top Layer w5.91: U2.P9@2159.69,4352.68 2329.8,4182.57 2329.8,4169.21 2356.14,4142.88 2356.14,4140.91 R74.1@2359.25,4137.8
NetR75_1: R75.1 U2.N8 | length 296.4
  Top Layer w5.91: U2.N8@2128.2,4384.17 2112.4,4368.37 2112.4,4295.51 2224.41,4183.5 R75.1@2224.41,4140.75
NetR76_1: R76.1 U2.R9 | length 337.8
  Top Layer w5.91: U2.R9@2159.73,4321.14 2311.65,4169.23 2311.65,4101.75 2330.72,4082.68 R76.1@2359.25,4082.68
NetR77_1: R77.1 U2.N7 | length 290.1
  Top Layer w5.91: U2.N7@2096.7,4384.17 2076.66,4364.13 2076.66,4293.42 2169.29,4200.79 R77.1@2169.29,4140.75
NetR78_1: R78.1 U2.R8 | length 243.1
  Top Layer w5.91: U2.R8@2128.2,4321.18 2128.21,4309.06 2274.39,4162.88 2274.39,4145.88 R78.1@2279.53,4140.75
NetR80_2: R80.2 U3.K1
NetR84_2: R84.2 R86.1 U3.E7
NetR85_1: R85.1 R122.1 U9.9
NetR91_1: R91.1 U4.2
NetR92_1: R92.1 U4.31
NetR93_1: R93.1 U4.29
NetR94_1: R94.1 U4.1
NetR95_1: R95.1 U4.24
NetR96_1: R96.1 U4.22
NetR97_1: R97.1 U4.13
NetR98_1: R98.1 U4.10
NetR99_1: R99.1 U4.9
NetR100_1: R100.1 U4.7
NetR101_1: R101.1 U4.6
NetR102_1: R102.1 U4.5
NetR103_1: R103.1 U4.4
NetR104_1: R104.1 U4.3
NetR105_1: R105.1 U4.26
NetR106_1: R106.1 X3.1
NetR116_2: R116.2 U5.8
NetR119_2: R119.2 R120.1 U9.1
  other v1: 1098.43,3429.13
NetR120_2: R120.2 R121.1 U9.2
NetR123_2: R123.2 R127.1 U10.4
NetR133_2: R133.2 R138.1 U13.3
NetR134_2: R134.2 R137.1 U13.2
NetR139_1: R139.1 R140.1 U13.5
NetR144_1: R144.1
NetR150_1: R150.1 R153.2 U14.1
NetR151_1: R151.1 U14.7
NetR152_1: R152.1 U14.3
NetR154_2: R154.2 U14.6
NetR155_2: R155.2 U14.5
NetR156_2: R156.2 U14.2
NetR157_1: R157.1 U15.6
NetR158_1: R158.1 U15.5
NetR159_1: R159.1 U15.4
NetR160_2: R160.2 SB2.1
NetR161_2: R161.2 SB2.2 U15.3
OSC32_IN: C25.2 U3.C2 X2.1
OSC32_OUT: C26.2 U3.C1 X2.2
OSC_24M: R105.2 X3.3
OSCIN: C22.2 U3.J1 X1.3
OSCOUT: C23.2 U3.J2 X1.1
REFSEL0: R108.2 R111.1 U4.8
REFSEL1: R109.2 R112.1 U4.11
REFSEL2: R110.2 R113.1 U4.14
RESET#: BT1.2 C24.2 J5.5 J6.5 R19.2 R80.1 R87.2 R107.2 R157.2 U4.27
SDIO1_CK: R20.1 U3.C12
SDIO1_CMD: R18.1 R21.1 U3.D12
SDIO1_D0: R1.1 R9.1 U3.E13
SDIO1_D1: R2.1 R10.1 U3.E14
SDIO1_D2: R3.1 R11.1 U3.A13
SDIO1_D3: R4.1 R12.1 U3.B13
SDIO1_D4: R5.1 R13.1 U3.D5
SDIO1_D5: R6.1 R14.1 U3.D4
SDIO1_D6: R7.1 R15.1 U3.F14
SDIO1_D7: R8.1 R16.1 U3.F13
SDRAM_A0: R45.1 U3.G4
SDRAM_A1: R43.1 U3.G3
SDRAM_A2: R41.1 U3.G1
SDRAM_A3: R39.1 U3.H4
SDRAM_A4: R37.1 U3.J5
SDRAM_A5: R35.1 U3.J4
SDRAM_A6: R33.1 U3.R7
SDRAM_A7: R31.1 U3.P7
SDRAM_A8: R29.1 U3.P8
SDRAM_A9: R27.1 U3.R9
SDRAM_A10: R25.1 U3.T8
SDRAM_A11: R23.1 U3.U8
SDRAM_BA0: R50.1 U3.H14
SDRAM_BA1: R48.1 U3.G14
SDRAM_D0: R78.2 U3.P16
SDRAM_D1: R77.2 U3.P15
SDRAM_D2: R76.2 U3.D13
SDRAM_D3: R75.2 U3.E12
SDRAM_D4: R74.2 U3.U9
SDRAM_D5: R73.2 U3.T9
SDRAM_D6: R72.2 U3.P9
SDRAM_D7: R70.2 U3.N9
SDRAM_D8: R68.2 U3.P10
SDRAM_D9: R66.2 U3.R10
SDRAM_D10: R64.2 U3.T10
SDRAM_D11: R63.2 U3.U10
SDRAM_D12: R61.2 U3.R11
SDRAM_D13: R59.2 U3.U16
SDRAM_D14: R57.2 U3.T17
SDRAM_D15: R55.2 U3.T16
SDRAM_D16: R52.2 U3.T13
SDRAM_D17: R51.2 U3.R13
SDRAM_D18: R49.2 U3.P13
SDRAM_D19: R47.2 U3.P14
SDRAM_D20: R46.2 U3.R14
SDRAM_D21: R44.2 U3.D16
SDRAM_D22: R42.2 U3.B17
SDRAM_D23: R40.2 U3.B16
SDRAM_D24: R38.2 U3.A16
SDRAM_D25: R36.2 U3.A15
SDRAM_D26: R34.2 U3.B15
SDRAM_D27: R32.2 U3.C14
SDRAM_D28: R30.2 U3.A2
SDRAM_D29: R28.2 U3.B3
SDRAM_D30: R26.2 U3.E2
SDRAM_D31: R24.2 U3.F3
SDRAM_NBL0: R71.1 U3.C4
SDRAM_NBL1: R69.1 U3.B4
SDRAM_NBL2: R67.1 U3.A4
SDRAM_NBL3: R65.1 U3.A3
SDRAM_SDCKE1: R60.1 U3.U13
SDRAM_SDCLK: R62.1 U3.F15
SDRAM_SDNCAS: R54.1 U3.D6
SDRAM_SDNE1: R58.1 U3.T11
SDRAM_SDNRAS: R56.1 U3.T7
SDRAM_SDNWE: R53.1 U3.P4
ULPI_CK: R94.2 U3.T3
ULPI_D0: R104.2 U3.U2
ULPI_D1: R103.2 U3.U5
ULPI_D2: R102.2 U3.T5
ULPI_D3: R101.2 U3.P11
ULPI_D4: R100.2 U3.P12
ULPI_D5: R99.2 U3.T14
ULPI_D6: R98.2 U3.U14
ULPI_D7: R97.2 U3.A5
ULPI_DIR: R92.2 U3.F4
ULPI_NXT: R91.2 U3.M4
ULPI_STP: R93.2 U3.L2
USB_CON_N: J7.8 R90.2 | length 3358.2
  Top Layer w15: J7.8@2803.15,3242.44 2803.15,3234.94 2808.65,3229.44 2811.39,3229.44 2820.18,3220.65 2820.18,2790.14 2834.82,2775.49 3392.76,2217.55 3392.76,335.18 3318.12,260.53 3244.86,260.53 3227.36,278.03 R90.2@3227.36,279.53
USB_CON_P: J7.7 R89.2 | length 3399.6
  Top Layer w15: J7.7@2862.2,3242.44 2862.2,3234.94 2856.7,3229.44 2853.96,3229.44 2845.18,3220.65 2845.18,2800.49 3417.76,2227.91 3417.76,324.82 3328.47,235.53 3244.86,235.53 3227.36,218.04 R89.2@3227.36,216.54
USB_HS_N: J1.2 R90.1 TVS1.A2 U4.18
USB_HS_P: J1.3 R89.1 TVS1.A1 U4.19
VBAT_BUS: J9.45 J9.46
WAKEUP: R158.2 U3.E3
WD_DONE: R159.2
pads on no net: J1.4 J3.3 J3.4 J3.8 J3.9 J4.3 J5.8 J8.02 J8.04 J8.05 J8.06 J8.07 J8.08 J8.09 J8.10 J8.11 J8.12 J8.13 J8.14 J8.15 J8.16 J8.17 J8.18 J8.19 J8.20 J8.21 J8.22 J8.23 J8.24 J8.25 J8.26 J8.27 J8.28 J8.29 J8.30 J8.31 J8.32 J8.33 J8.34 J8.35 J8.36 J8.37 J8.45 J8.46 J9.01 J9.02 J9.03 J9.04 J9.05 J9.06 J9.07 J9.08 J9.09 J9.10 J9.11 J9.12 J9.13 J9.14 J9.15 J9.16 J9.17 J9.18 J9.19 J9.20 J9.21 J9.22 J9.23 J9.24 J9.33 J9.34 J9.35 J9.36 J9.37 J9.38 J9.39 J9.40 J9.41 J9.42 J9.43 J9.44 J9.49 J9.50 J9.51 J9.52 U1.A1 U1.A2 U1.A7 U1.A8 U1.A9 U1.A10 U1.A11 U1.A12 U1.A13 U1.A14 U1.B1 U1.B7 U1.B8 U1.B9 U1.B10 U1.B11 U1.B12 U1.B13 U1.B14 U1.C1 U1.C3 U1.C5 U1.C7 U1.C8 U1.C9 U1.C10 U1.C11 U1.C12 U1.C13 U1.C14 U1.D1 U1.D2 U1.D3 U1.D4 U1.D12 U1.D13 U1.D14 U1.E1 U1.E2 U1.E3 U1.E5 U1.E8 U1.E9 U1.E10 U1.E12 U1.E13 U1.E14 U1.F1 U1.F2 U1.F3 U1.F10 U1.F12 U1.F13 U1.F14 U1.G1 U1.G2 U1.G3 U1.G10 U1.G12 U1.G13 U1.G14 U1.H1 U1.H2 U1.H3 U1.H12 U1.H13 U1.H14 U1.J1 U1.J2 U1.J3 U1.J12 U1.J13 U1.J14 U1.K1 U1.K2 U1.K3 U1.K6 U1.K7 U1.K10 U1.K12 U1.K13 U1.K14 U1.L1 U1.L2 U1.L3 U1.L12 U1.L13 U1.L14 U1.M1 U1.M2 U1.M3 U1.M7 U1.M8 U1.M9 U1.M10 U1.M11 U1.M12 U1.M13 U1.M14 U1.N1 U1.N3 U1.N6 U1.N7 U1.N8 U1.N9 U1.N10 U1.N11 U1.N12 U1.N13 U1.N14 U1.P1 U1.P2 U1.P7 U1.P8 U1.P9 U1.P10 U1.P11 U1.P12 U1.P13 U1.P14 U2.E3 U2.E7 U2.H3 U2.H7 U2.K2 U2.K3 U3.A8 U3.A9 U3.A10 U3.A11 U3.A12 U3.B7 U3.B8 U3.B11 U3.B12 U3.C3 U3.C7 U3.C8 U3.C9 U3.D1 U3.D2 U3.D3 U3.D7 U3.D8 U3.D9 U3.D14 U3.D15 U3.E4 U3.E5 U3.F16 U3.G15 U3.H1 U3.H2 U3.H3 U3.H15 U3.H16 U3.H17 U3.J14 U3.J15 U3.K2 U3.K3 U3.K4 U3.K16 U3.K17 U3.L3 U3.L4 U3.L16 U3.L17 U3.M2 U3.M3 U3.M16 U3.M17 U3.N2 U3.N17 U3.P2 U3.P3 U3.P5 U3.R1 U3.R2 U3.R3 U3.R5 U3.R6 U3.R15 U3.T1 U3.T2 U3.T4 U3.T15 U3.U3 U3.U4 U3.U15 U4.12 U4.15 U4.16 U4.17 U4.25 U10.2 U10.3 U10.5
copper on no net: | length 1371.2
  Top Layer w5.91: 586.35,4785.14 586.35,4705.41 650.33,4641.43 650.33,4520.69 656.98,4514.04 681.89,4514.04 691.74,4514.04 731.11,4553.41 ; 629.65,4395.93 672.05,4395.93 691.74,4395.93 711.42,4395.93 731.11,4395.93 770.48,4356.56 ; 629.65,4415.61 672.05,4415.61 672.12,4415.55 731.17,4415.55 750.79,4395.93 ; 629.65,4435.3 672.05,4435.3 691.74,4435.3 750.79,4435.3 711.42,4435.3 ; 672.05,4376.24 632.96,4376.24 691.74,4376.24 711.42,4376.24 731.11,4376.24 750.79,4356.56 ; 672.05,4599.98 672.05,4573.09 691.74,4553.41 ; 691.74,4599.98 691.74,4573.09 711.42,4553.41 ; 750.79,4532.42 750.79,4533.72 750.79,4553.41 ; 751.11,4533.72 763.63,4521.2 763.63,4512.05 768.23,4507.45 789.16,4507.45 794.62,4512.9 794.62,4518.64 809.71,4533.72 ; 770.48,4553.41 790.16,4553.41 809.85,4573.09 809.85,4599.98 ; 809.85,4533.72 809.85,4553.41 829.53,4573.09 829.53,4599.98
  other v1: 1031.5,3224.41 1098.43,3224.41 2145.66,4775.58

## Keep-outs
Keep-Out Layer:
  the board outline again, w3

## Silkscreen, mask and mechanical layers (free items; w line width, h text height)
Top Courtyard:
  lines w5: 59.06,59.06 3602.36,59.06 3602.36,3484.25 59.06,3484.25 59.06,59.06